# EAGLE board RobotBoard (EAGLE 7.2.0)
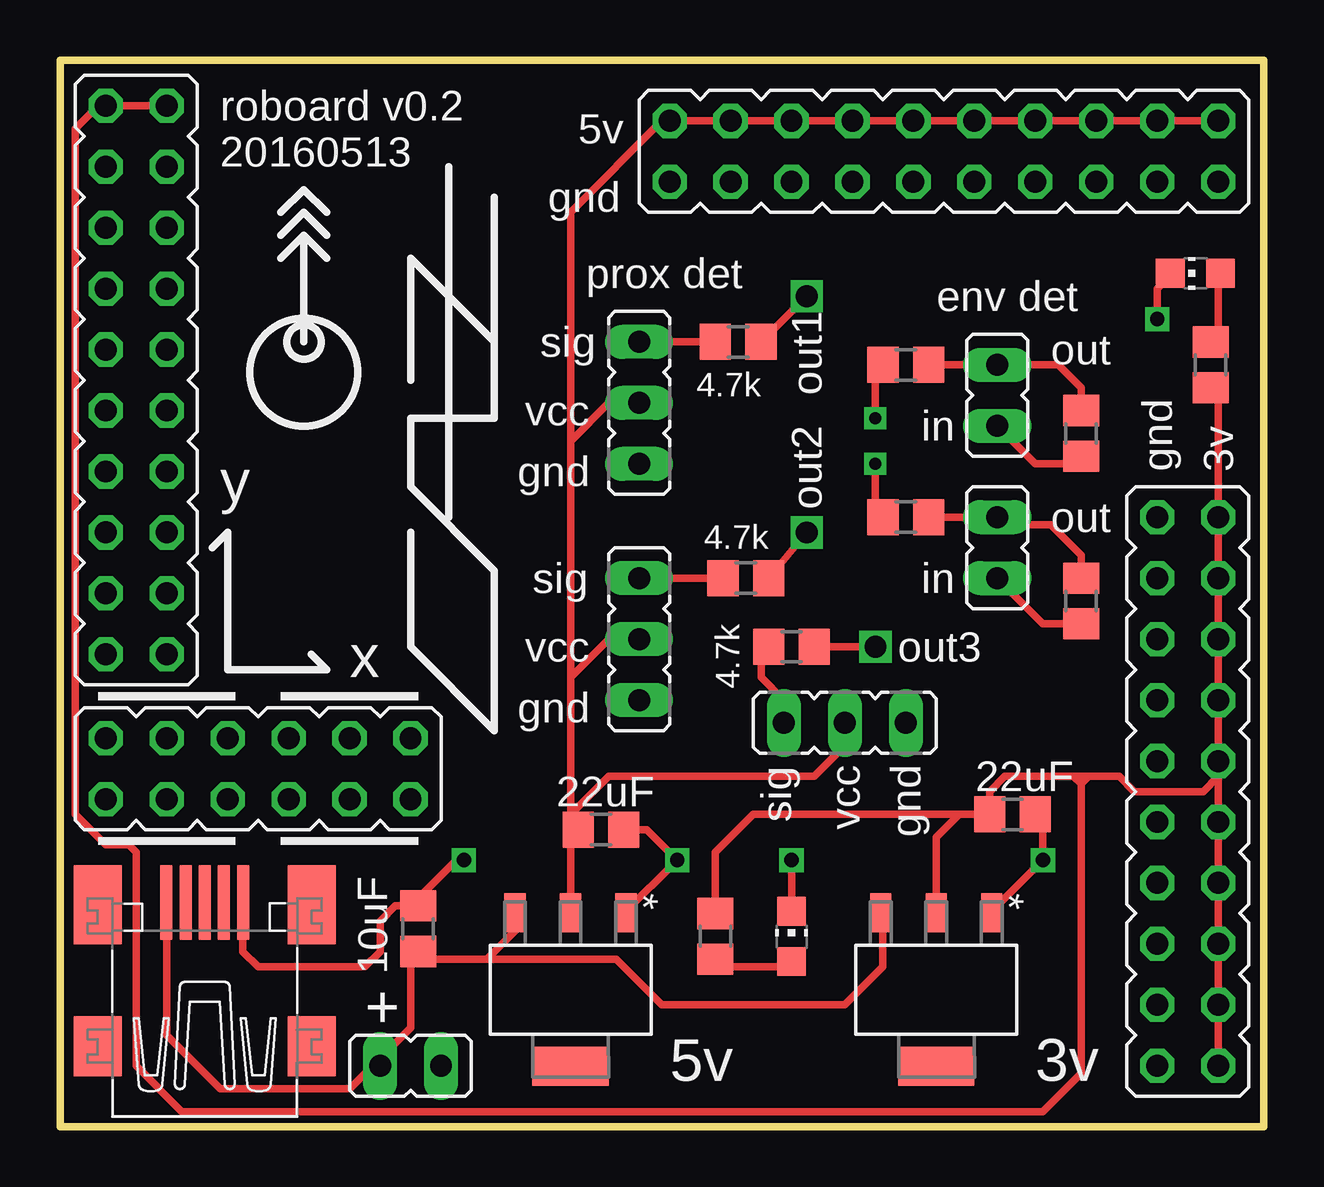
[diagram p0: board, top side]
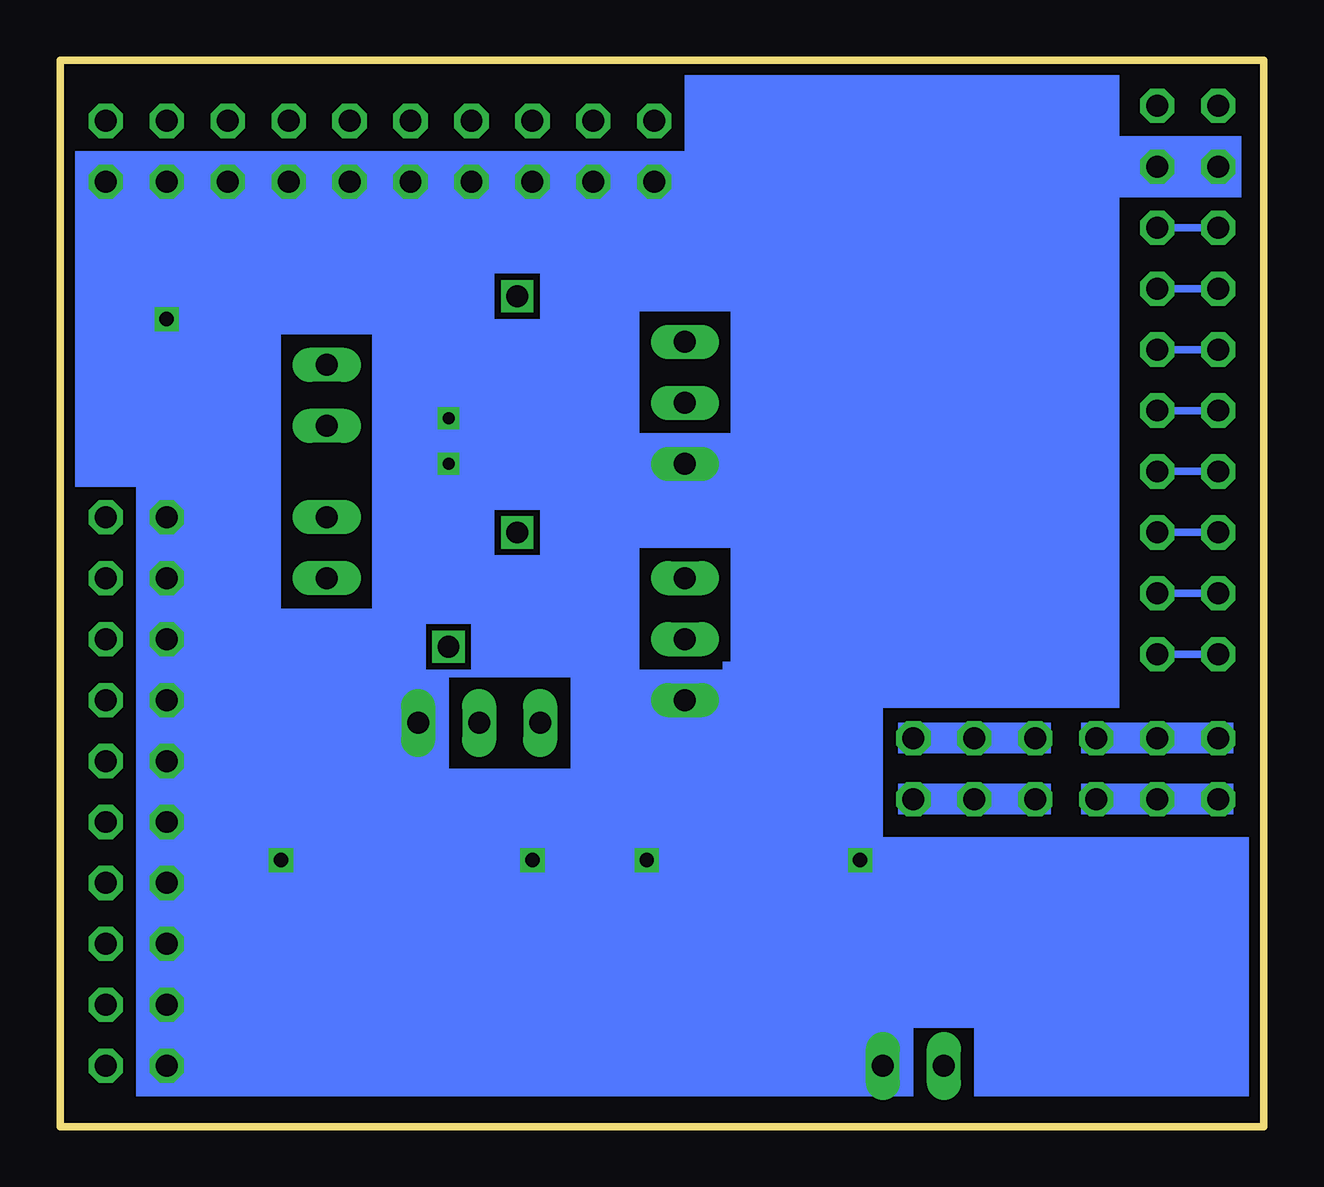
[diagram p1: board, bottom side, seen from below]

Size 50.16 x 44.45 mm. Coordinates in mm from the lower left corner, seen from the top.
Outline: 0,0 0,44.45 50.16,44.45 50.16,0 0,0
Copper layers (1*16): Top 0.035mm / dielectric 1.5mm / Bottom 0.035mm
Design rules "default": minimum track width 10mil, minimum drill 24mil, track to track 8mil, track to pad 8mil, pad to pad 8mil, via to via 8mil, smd to smd 8mil, copper to edge 40mil, drill to drill 8mil, minimum pad ring 10mil, minimum via ring 8mil, stop-mask expansion 4mil, vias tented up to drill 0mil, thermal gap 10mil

## Footprints (pad centres in the part's own frame; a part is rotated, then mirrored left to right if it is on the bottom)
SOT230P700X180-4N = smd 1.626 x 0.889: 1 -3.2,2.311; 2 -3.2,0; 3 -3.2,-2.311 | smd 1.626 x 3.175: 4 3.2,0
R0805 = smd 1.3 x 1.5: 1 -0.95,0; 2 0.95,0
JP10Q = drill 0.914 octagon: 1 -11.43,-1.27; 2 -11.43,1.27; 3 -8.89,-1.27; 4 -8.89,1.27; 5 -6.35,-1.27; 6 -6.35,1.27; 7 -3.81,-1.27; 8 -3.81,1.27; 9 -1.27,-1.27; 10 -1.27,1.27; 11 1.27,-1.27; 12 1.27,1.27; 13 3.81,-1.27; 14 3.81,1.27; 15 6.35,-1.27; 16 6.35,1.27; 17 8.89,-1.27; 18 8.89,1.27; 19 11.43,-1.27; 20 11.43,1.27
32005-400 = smd 3.1 x 0.5: 1 3,1.6; 2 3,0.8; 3 3,0; 4 3,-0.8; 5 3,-1.6 | smd 2.5 x 2: M1 -3,-4.45; M2 -3,4.45 | smd 3.3 x 2: M3 2.9,4.45; M4 2.9,-4.45
JP2Y = drill 0.914 long: 1 -2.54,0; 2 0,0; 3 2.54,0
JP1 = drill 0.914 long: 1 0,-1.27; 2 0,1.27
CHIP-LED0805 = smd 1.2 x 1.2: A 0,-1.05; C 0,1.05
JP6Q = drill 0.914 octagon: 1 -6.35,-1.27; 2 -6.35,1.27; 3 -3.81,-1.27; 4 -3.81,1.27; 5 -1.27,-1.27; 6 -1.27,1.27; 7 1.27,-1.27; 8 1.27,1.27; 9 3.81,-1.27; 10 3.81,1.27; 11 6.35,-1.27; 12 6.35,1.27

## Placement (x,y rotation side)
E$1  [SOT230P700X180-4N]  21.27,5.71 270 top
E$2  [SOT230P700X180-4N]  36.51,5.71 270 top
E$3  [R0805]  42.55,21.91 90 top
E$4  [R0805]  22.54,12.38 180 top
E$5  [R0805]  28.26,32.7 0 top
E$6  [R0805]  39.69,13.02 180 top
E$7  [R0805]  28.57,22.86 0 top
E$8  [R0805]  14.92,8.26 90 top
E$9  [JP10Q]  3.17,31.11 90 top
E$10  [32005-400]  6.03,6.35 90 top
E$11  [JP2Y]  24.13,20.32 90 top
E$12  [JP2Y]  24.13,30.16 90 top
E$13  [JP1]  39.05,24.13 0 top
E$14  [JP1]  39.05,30.48 0 top
E$15  [R0805]  35.24,25.4 0 top
E$16  [R0805]  42.55,28.89 90 top
E$17  [R0805]  35.24,31.75 0 top
E$18  [JP10Q]  46.99,13.97 90 top
E$19  [JP10Q]  36.83,40.64 180 top
E$20  [R0805]  27.3,7.94 270 top
E$21  [CHIP-LED0805]  30.48,7.94 0 top
E$22  [CHIP-LED0805]  47.31,35.56 90 top
E$23  [R0805]  47.94,31.75 90 top
E$24  [JP1]  14.61,2.54 90 top
E$25  [JP6Q]  8.26,14.92 0 top
E$26  [JP2Y]  32.7,16.83 180 top
E$27  [R0805]  30.48,20 0 top

## Library data of the parts
E$1 E$2 = LD1117s_VoltageRegulator
E$3-E$8 E$15-E$17 E$20 E$23 E$27 = eagle-ltspice
E$9 E$18 E$19 = jumper4
E$10 = con-cypressindustries
E$11 E$12 E$26 = jumper3plain
E$13 E$14 E$24 E$25 = jumper
E$21 E$22 = ref-packages

## Nets
S$2: E$9.15 E$9.16
S$5: E$26.3
S$7: E$12.3
S$12: E$11.2 E$12.2 E$19.1 E$26.2
S$13: E$13.1
S$15: E$14.1
S$20: E$11.1
S$22: E$19.20
S$24: E$9.14
S$25: E$9.12
S$26: E$9.9 E$9.10
S$27: E$9.7 E$9.8
S$28: E$9.5 E$9.6
S$29: E$9.3 E$9.4
S$30: E$9.1 E$9.2
S$31: E$9.19 E$18.9

## Tracks (layer width: path | path; a pad name or v marks a point on that pad's centre or on a via)
S$1
  Top 0.305: 4.45,9.84 4.45,3.81 6.67,1.59 12.06,1.59 14.61,4.13 14.61,6.99
S$2
  Bottom 0.305: E$9.16 E$9.15
S$3
  Top 0.305: 15.24,6.99 17.78,6.99 | 17.78,6.99 19.05,8.26 | 17.78,6.99 23.18,6.99 25.08,5.08 32.7,5.08 34.29,6.67 34.29,8.57
S$5
  Top 0.305: E$26.3 30.16,17.78 29.21,18.73 29.21,19.68
S$6
  Top 0.305: 26.99,6.67 30.16,6.67 30.48,6.99
S$7
  Top 0.305: E$12.3 27.3,32.7
S$8  (via drill 0.5)
  Top 0.305: v33.97,27.62 33.97,25.4 34.29,25.08
S$9  (via drill 0.5)
  Top 0.305: v33.97,29.53 33.97,31.43 34.29,31.75
S$10  (via drill 0.9)
  Top 0.305: 29.21,32.7 v31.11,34.61
S$11  (via drill 0.9)
  Top 0.305: 29.53,22.86 v31.11,24.77
  other vias: 33.97,20
S$12
  Top 0.305: E$19.1 25.08,41.91 21.27,38.1 21.27,28.58 | 21.27,8.57 21.27,13.02 | 21.27,13.02 21.27,18.73 | 21.27,18.73 21.27,28.58 | E$12.2 22.86,30.16 21.27,28.58 | E$11.2 22.86,20.32 21.27,18.73 | 21.27,13.02 22.86,14.6 31.43,14.6 32.7,15.87 E$26.2
S$13
  Top 0.305: E$13.1 40.96,20.95 42.86,20.95
S$14
  Top 0.305: 42.55,22.86 42.55,23.81 41.27,25.08 40.01,25.08
S$15
  Top 0.305: E$14.1 40.64,27.62 42.23,27.62 42.55,27.94
S$16
  Top 0.305: 42.55,30.16 42.55,30.8 41.59,31.75 39.69,31.75
S$17
  Top 0.305: 38.42,31.75 36.2,31.75
S$18
  Top 0.305: 24.45,22.86 27.62,22.86
S$19
  Top 0.305: 48.26,33.02 48.26,35.56
S$20  (via drill 0.6)
  Top 0.305: 23.5,8.89 v25.72,11.11 24.45,12.38 23.5,12.38 | 7.62,9.21 7.62,7.3 8.26,6.67 12.7,6.67 13.34,7.3 13.34,8.57 13.97,9.21 14.61,9.21 16.51,11.11 v16.83,11.11
  Bottom 0.305: E$11.1 26.99,17.78 27.62,17.15 27.62,14.92 25.72,13.02 | 14.92,9.21 v16.83,11.11 | v16.83,11.11 v25.72,11.11 25.72,13.02 | 25.72,13.02 24.13,14.6 | v16.83,11.11 16.83,4.13 15.56,2.86
S$21  (via drill 0.6)
  Top 0.305: 30.48,9.21 v30.48,11.11 30.48,8.89
S$22
  Bottom 0.305: 27.3,37.15 E$19.20
S$24
  Bottom 0.305: E$9.14 4.76,34.93
S$25
  Bottom 0.305: E$9.12 4.13,32.39 4.45,32.7
S$26
  Bottom 0.305: E$9.10 E$9.9
S$27
  Bottom 0.305: E$9.8 E$9.7
S$28
  Bottom 0.305: E$9.6 E$9.5
S$29
  Bottom 0.305: E$9.4 E$9.3
S$30
  Bottom 0.305: E$9.2 E$9.1
S$31
  Top 0.305: 42.55,14.29 42.55,2.22 40.96,0.64 5.08,0.64 3.17,2.54 3.17,11.43 2.86,11.75 1.91,11.75 0.64,13.02 0.64,41.59 1.59,42.54 E$9.19 | 36.51,8.89 36.51,12.07 37.47,13.02 | 39.05,13.02 38.73,13.02 | 38.73,13.02 37.47,13.02 | 37.47,13.02 28.89,13.02 27.3,11.43 27.3,8.89 | 38.73,13.02 38.73,13.97 39.37,14.6 42.23,14.6 | 48.26,14.6 48.26,30.48 | 48.26,14.6 47.62,13.97 44.77,13.97 44.13,14.6 42.86,14.6 | 48.26,14.6 E$18.9 48.26,2.22 | 42.23,14.6 42.86,14.6 | 42.55,14.29 42.23,14.6 | 42.55,14.29 42.86,14.6
S$32
  Top 0.305: 31.43,20 33.66,20
S$33
  Top 0.305: 38.42,25.4 36.2,25.4
S$34  (via drill 0.6)
  Top 0.305: v45.72,33.65 45.72,34.93 46.35,35.56
S$35  (via drill 0.6)
  Top 0.305: 39.05,9.21 v40.96,11.11 40.96,13.02
  Bottom 0.305: v40.96,11.11 40.96,9.21
(copper drawn outside any net)
  shapes: Bottom area x40

## Text on the board
tPlace: 5v | roboard v0.2 / 20160513 | gnd | prox det | env det | sig | 4.7k | out | out1 | vcc | in | gnd | 3v | y | gnd | 4.7k | out2 | out | sig | in | 4.7k | out3 | vcc | x | gnd | 22uF | 22uF | sig | vcc | gnd | 10uF | + | 5v | 3v